# Altium PCB test4.PcbDoc
Units mil, origin at the board's own origin, x right, y up, seen from the top; angles counter-clockwise.
Board outline 6000 x 4000 mil, 2 copper layers (Top Layer, Bottom Layer); 114 components, 99 nets, 454 pads, 8 vias.
Unrouted connection lines stored in the file: 321.
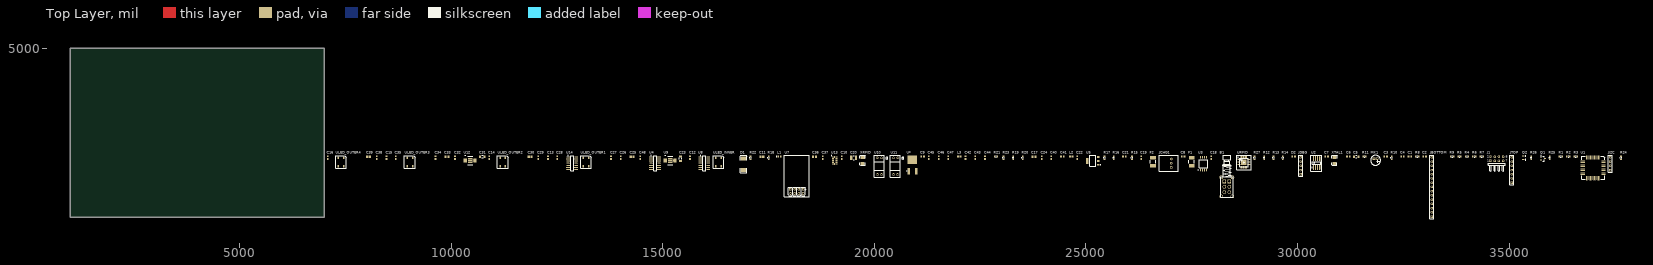
[diagram p0: Top Layer view]
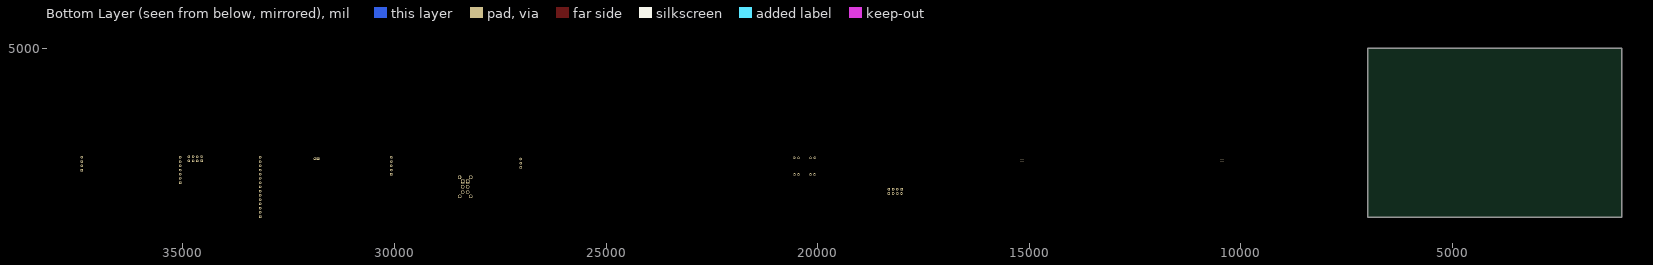
[diagram p1: Bottom Layer view, seen from below]

## Layer stack, top to bottom
Top Layer: signal copper 1.4
Dielectric: dielectric 12.6, FR-4, Dk 4.8
Bottom Layer: signal copper 1.4

## Board outline
1000,1000 7000,1000 7000,5000 1000,5000

## Design rules (kind name [scope] priority, off if disabled: settings)
Clearance [All] p1: gap=8
PolygonConnect [All] p1: connectstyle=Relief reliefconductorwidth=10 reliefentries=4 polygonreliefangle="90 Angle"
RoomDefinition main_pcb [InComponentClass('main_pcb')] p1: confinementstyle=ConfineIn formatcopy=TRUE lockcomponents=FALSE outline 7045,960 37800,960 37800,2580 7045,2580
RoutingVias [All] p1: holewidth=28 width=50 viastyle="Through Hole" minholewidth=28 minwidth=50 maxholewidth=28 maxwidth=50
SilkscreenOverComponentPads [All] p1: minsilkscreentomaskgap=10
SolderMaskExpansion [All] p1: expansion=4
Width [All] p1: maxlimit=10 minlimit=10 preferedwidth=10
27 further rules are at their usual default settings.

## Components (designator, comment, footprint, x,y, rotation, side; value= is the part's Value field where it differs from the comment)
B1 "ON/OFF" KGPS22F03 28325,1720 r0 top
C1 "100n" CAPC1608N 32655,2440 r0 top
C2 "18pF" CAPC1608N 33005,2440 r0 top
C3 "100n" CAPC1608N 32085,2440 r0 top
C4 "18pF" CAPC1608N 32480,2440 r0 top
C5 "10uF" CAPC3216L 31390,2435 r0 top
C6 "100nF" CAPC1608N 31200,2440 r0 top
C7 "100nF" CAPC1608N 30690,2440 r0 top
C8 "100n" CAPC1608N 27300,2440 r0 top
C9 "15p" CAPC1608N 21145,2440 r0 top
C10 "15p" CAPC1608N 19230,2410 r90 top
C11 "10u" CAPC2012N 17345,2430 r0 top
C12 "100n" CAPC1608N 15645,2410 r90 top
C13 "100n" CAPC1608N 12290,2410 r90 top
C14 "100n" CAPC1608N 10900,2410 r90 top
C15 "100n" CAPC1608N 8475,2410 r90 top
C16 "100n" CAPC1608N 7085,2410 r90 top
C17 "10uF" CAPC2012N 23775,2430 r0 top
C18 "100nF" CAPC1608N 27965,2410 r90 top
C19 "100nF" CAPC1608N 26310,2410 r90 top
C20 "100uF" CAPC3225N 19515,2410 r0 top
C21 "100n" CAPC1608N 25910,2440 r0 top
C22 "15p" CAPC1608N 24795,2410 r90 top
C23 "10uF" CAPC3216L 15425,2390 r90 top
C24 "47p" CAPC1608N 23955,2410 r90 top
C25 "10nF/16V" CAPC2012N 14280,2430 r0 top
C26 "100n" CAPC1608N 14010,2410 r90 top
C27 "100n" CAPC1608N 13780,2410 r90 top
C28 "100n" CAPC1608N 12510,2410 r90 top
C29 "100n" CAPC1608N 12060,2410 r90 top
C30 "2.2uF" CAPC2012N 11870,2430 r0 top
C31 "10uF" CAPC3216L 10740,2435 r0 top
C32 "100n" CAPC1608N 10095,2410 r90 top
C33 "10nF/16V" CAPC2012N 9905,2430 r0 top
C34 "100n" CAPC1608N 9635,2410 r90 top
C35 "100n" CAPC1608N 8695,2410 r90 top
C36 "Tantalum 1uF" CAPC2012N 18590,2430 r0 top
C37 "100n" CAPC1608N 18780,2410 r90 top
C38 "100n" CAPC1608N 8245,2410 r90 top
C39 "2.2uF" CAPC2012N 8055,2430 r0 top
C40 "180p" CAPC1608N 24185,2410 r90 top
C41 "10p" CAPC1608N 24445,2440 r0 top
C42 "47p" CAPC1608N 22155,2410 r90 top
C43 "180p" CAPC1608N 22385,2410 r90 top
C44 "10p" CAPC1608N 22615,2410 r90 top
C45 "15p" CAPC1608N 21290,2410 r90 top
C46 "100n (O)" CAPC1608N 21520,2410 r90 top
C47 "100n (O)" CAPC1608N 21750,2410 r90 top
C48 "100n" CAPC1608N 14470,2410 r90 top
D1 "MBR0540" DSO-C2/X3.3 16910,2255 r90 top
D2 "LED3" CAPC1608N 29910,2440 r0 top
F1 "miniSMDC260F/12" miniSMDC260F/12 27500,2315 r90 top
F2 "miniSMDC260F/12" miniSMDC260F/12 26590,2315 r90 top
J1 "XSP" HDR2X4H 34560,2335 r0 top
JBOTTOM "Header 15" HDR1X15 33175,1020 r90 top
JCHG1 "Charger" S3B-XH-A(LF)(SN) 26800,2280 r0 top
JDBG "Header 5" HDR1X5 30075,2020 r90 top
JI2C "Header 4" HDR1X4 37390,2120 r90 top
JTOP "Header 7" HDR1X7 35065,1820 r90 top
L1 "10uH" INDC1608N 17760,2440 r0 top
L2 "2.2uH" INDC2012L 24655,2440 r0 top
L3 "2.2uH" INDC2012L 22010,2440 r0 top
MK1 "Mic2" electret_6mm 31845,2350 r0 top
Q1 "IRLML2402" SOT-23_N 35800,2390 r0 top
Q2 "IRLML2244TRPbF" SOT23_NCH 35370,2410 r0 top
R1 "10k" RESC1608N 36220,2440 r0 top
R2 "10k" RESC1608N 36400,2440 r0 top
R3 "20k" RESC1608N 36575,2440 r0 top
R4 "10k" RESC1608N 34005,2440 r0 top
R5 "10K" RESC1608N 33830,2440 r0 top
R6 "10k" RESC1608N 34180,2440 r0 top
R7 "10k" RESC1608N 34355,2440 r0 top
R8 "100k" RESC1608N 32830,2440 r0 top
R9 "10k" RESC1608N 33655,2440 r0 top
R10 "3.3k" RESC1608N 32225,2410 r90 top
R11 "22" RESC1608N 31585,2440 r0 top
R12 "10k" RESC1608N 29215,2410 r90 top
R13 "10k" RESC1608N 29435,2410 r90 top
R14 "10k" RESC1608N 29655,2410 r90 top
R15 "820" RESC1608N 26090,2410 r90 top
R16 "5.1k" RESC1608N 25660,2410 r90 top
R17 "10k" RESC1608N 25440,2410 r90 top
R18 "10k" RESC1608N 17505,2410 r90 top
R19 "1K" RESC1608N 23285,2410 r90 top
R20 "" RESC1608N 23505,2410 r90 top
R21 "" RESC1608N 22875,2440 r0 top
R22 "10k" RESC1608N 17075,2410 r90 top
R23 "1K" RESC1608N 23055,2410 r90 top
R24 "10k" RESC1608N 37645,2410 r90 top
R25 "10k" RESC1608N 35960,2410 r90 top
R26 "10k" RESC1608N 35525,2410 r90 top
R27 "470" RESC1608N 28985,2410 r90 top
U1 "MCU" atmega644p 36975,2135 r0 top
U2 "LM358D" LM358D 30450,2285 r90 top
U3 "W25Q64BVSIG" W25Q64BVSIG 27785,2270 r90 top
U4 "SN74HC04D" D014_N 14820,2280 r0 top
U5 "AZ1117CH-3.3" SOT223 25175,2325 r0 top
U7 "ESP8266" ESP8266 18110,1615 r90 top
U8 "SN74HC08D" D014_N 15985,2280 r0 top
U9 "DRV8833" DRV8833 15175,2345 r0 top
U10 "ITR9608" ITR9608 20100,2185 r0 top
U11 "ITR9608" ITR9608 20480,2185 r0 top
U12 "DRV8833" DRV8833 10450,2345 r0 top
U13 "ADXL345BCCZ" ADXL345 19065,2345 r0 top
U14 "SN74HC08D" D014_N 12860,2280 r0 top
U* "AZ1084CD-5.0" AZ1084CD-5.0 20900,2255 r90 top
ULED_INNER "WS2812B" WS2812B 16320,2310 r90 top
ULED_OUTER1 "WS2812B" WS2812B 13195,2310 r90 top
ULED_OUTER2 "WS2812B" WS2812B 11225,2310 r90 top
ULED_OUTER3 "WS2812B" WS2812B 9030,2310 r90 top
ULED_OUTER4 "WS2812B" WS2812B 7405,2310 r90 top
URFID "MFRC52202HN1" MFRC52202HN1 28735,2300 r0 top
XRFID "7A-27.120MAAJ-T" XTAL 19740,2345 r90 top
XTAL1 "ABM7-8.000MHZ-D2Y-T" XTAL 30885,2345 r90 top

## Footprints (in the part's own frame and the unit in brackets; to place one, negate y for a bottom-side part, rotate by r counter-clockwise, add the part's x,y. Pads: shape width x height; smd on the part's side, far side on the other; paste and mask are expansions set on the pad)
ADXL345 [mm] "BGA, 14-Leads, Body 5.0x3.0mm,  Pitch 0.80mm"
  oct 1.145x0.55 smd: 1(-1.1,2)
  rect 1.145x0.55 smd: 2(-1.1,1.2) 3(-1.1,0.4) 4(-1.1,-0.4) 5(-1.1,-1.2) 6(-1.1,-2) 8(1.1,-2) 9(1.1,-1.2) 10(1.1,-0.4) 11(1.1,0.4) 12(1.1,1.2) 13(1.1,2)
  rect 0.6x1.145 smd: 7(0,-2) 14(0,2)
  silkscreen extent -2.05,2.88 -1.8,3.12, body extent -1.5,-2.5 1.5,2.5, height 1
atmega644p [mil]
  oval 16x100 smd: 1(167.45,282.95) 2(136.45,282.95) 3(104.45,282.95) 4(73.45,282.95) 5(41.45,282.95) 6(10.45,282.95) 7(-20.55,282.95) 8(-52.55,282.95) 9(-83.55,282.95) 10(-115.55,282.95) 11(-146.55,282.95) 23(-146.55,-207.05) 24(-115.55,-207.05) 25(-83.55,-207.05) 26(-52.55,-207.05) 27(-20.55,-207.05) 28(10.45,-207.05) 29(41.45,-207.05) 30(73.45,-207.05) 31(104.45,-207.05) 32(136.45,-207.05) 33(167.45,-207.05)
  oval 100x16 smd: 12(-234.55,194.95) 13(-234.55,163.95) 14(-234.55,131.95) 15(-234.55,100.95) 16(-234.55,68.95) 17(-234.55,37.95) 18(-234.55,6.95) 19(-234.55,-25.05) 20(-234.55,-56.05) 21(-234.55,-88.05) 22(-234.55,-119.05) 34(255.45,-119.05) 35(255.45,-88.05) 36(255.45,-56.05) 37(255.45,-25.05) 38(255.45,6.95) 39(255.45,37.95) 40(255.45,68.95) 41(255.45,100.95) 42(255.45,131.95) 43(255.45,163.95) 44(255.45,194.95)
  silkscreen extent -260,-232 280,308, body extent -183,-162 227,244, height 39
AZ1084CD-5.0 [mm] "D-PAK, 3-Pads, Body 6.2x6.7mm (max), IPC Low Density"
  rect 4x1.5 smd: 1(-4.2,2.1) 3(-4.2,-2.2)
  rect 5.25x5.6 smd: 2(2.8,0)
  silkscreen extent -4.07,3.24 -3.83,3.49, body extent -3.05,-3.35 3.15,3.35, height 2.38
CAPC1608N [mm] "Chip Capacitor, Body 1.6x0.8mm, IPC Medium Density"
  rect 1x1 smd: 1(-0.8,0) 2(0.8,0)
  body extent -0.87,-0.48 0.87,0.48, height 0.85
CAPC2012N [mm] "Chip Capacitor, Body 2.0x1.3mm, IPC Medium Density"
  rect 1.3x1.5 smd: 1(-0.85,0) 2(0.85,0)
  body extent -1.1,-0.72 1.1,0.72, height 1.1
CAPC3216L [mm] "Chip Capacitor, Body 3.2x1.6mm, IPC High Density"
  rect 1.1x1.7 smd: 1(-1.35,0) 2(1.35,0)
  silkscreen extent -0.4,-0.75 0.4,0.75, body extent -1.7,-0.9 1.7,0.9, height 1.3
CAPC3225N [mm] "Chip Capacitor, Body 3.2x2.5mm, IPC Medium Density"
  rect 1.3x2.7 smd: 1(-1.45,0) 2(1.45,0)
  silkscreen extent -0.4,-1.25 0.4,1.25, body extent -1.7,-1.35 1.7,1.35, height 1.5
D014_N [mm] "SOIC, 14-Leads, Body 8.7x3.9mm, Pitch 1.27mm, IPC Medium Density"
  oval 2.2x0.6 smd: 1(-2.4,3.81) 2(-2.4,2.54) 3(-2.4,1.27) 4(-2.4,0) 5(-2.4,-1.27) 6(-2.4,-2.54) 7(-2.4,-3.81) 8(2.4,-3.81) 9(2.4,-2.54) 10(2.4,-1.27) 11(2.4,0) 12(2.4,1.27) 13(2.4,2.54) 14(2.4,3.81)
  silkscreen extent -2.52,-4.4 0.9,4.78, body extent -1.95,-4.33 1.95,4.33, height 1.75
DRV8833 [mm]
  oval 2x0.35 smd: 1(-2.9,2.275) 2(-2.9,1.625) 3(-2.9,0.975) 4(-2.9,0.325) 5(-2.9,-0.325) 6(-2.9,-0.975) 7(-2.9,-1.625) 8(-2.9,-2.275) 9(2.9,-2.275) 10(2.9,-1.625) 11(2.9,-0.975) 12(2.9,-0.325) 13(2.9,0.325) 14(2.9,0.975) 15(2.9,1.625) 16(2.9,2.275)
  rect 2.7x2.8 smd: PP(0,0)
  silkscreen extent -3.02,-2.55 1.5,3.12, body extent -2.25,-2.55 2.25,2.55, height 1.2
DSO-C2/X3.3 [mm] "DO-214-AB/SMC; 2 C-Bend Leads; Body 7.9 x 5.9 mm, inc. leads (LxW)"
  rect 2.4x3.3 smd: 1(-3.475,0) 2(3.475,0)
  silkscreen extent -5.07,-2.05 5.43,2.05
electret_6mm [mil]
  round 60 hole 30: 1(37.4,39.37)
  rect 60x60 hole 30: 2(-37.4,39.37)
  silkscreen extent -118,-118 118,118
ESP8266 [mil]
  round 60 hole 32: CH_PD(-49.94,-9.12) GPIO0(50.06,-109.12) GPIO2(50.06,-9.12) RST(-49.94,-109.12) RXD(50.06,-209.12) TXD(-49.94,90.88) VCC(-49.94,-209.12)
  rect 60x60 hole 32: GND(50.06,90.88)
  silkscreen extent -130,-354 854,236, body extent -94,-248 91,130, height 315
HDR1X4 [mm] "Connector; Header; 4 Position"
  rect 1.5x1.5 hole 0.9: 1(0,0)
  round 1.5 hole 0.9: 2(2.54,0) 3(5.08,0) 4(7.62,0)
  silkscreen extent -1.27,-1.27 8.89,1.27
HDR1X5 [mm] "Connector; Header; 5 Position"
  rect 1.5x1.5 hole 0.9: 1(0,0)
  round 1.5 hole 0.9: 2(2.54,0) 3(5.08,0) 4(7.62,0) 5(10.16,0)
  silkscreen extent -1.27,-1.27 11.43,1.27
HDR1X7 [mm] "Connector; Header; 7 Position"
  rect 1.5x1.5 hole 0.9: 1(0,0)
  round 1.5 hole 0.9: 2(2.54,0) 3(5.08,0) 4(7.62,0) 5(10.16,0) 6(12.7,0) 7(15.24,0)
  silkscreen extent -1.27,-1.27 16.51,1.27
HDR1X15 [mm] "Connector; Header; 15 Position"
  rect 1.5x1.5 hole 0.9: 1(0,0)
  round 1.5 hole 0.9: 2(2.54,0) 3(5.08,0) 4(7.62,0) 5(10.16,0) 6(12.7,0) 7(15.24,0) 8(17.78,0) 9(20.32,0) 10(22.86,0) 11(25.4,0) 12(27.94,0) 13(30.48,0) 14(33.02,0) 15(35.56,0)
  silkscreen extent -1.27,-1.27 36.83,1.27
HDR2X4H [mm] "Connector; Header; 4x2 Position; Right Angle"
  rect 1.5x1.5 hole 0.9: 1(0,0)
  round 1.5 hole 0.9: 2(0,2.54) 3(2.54,0) 4(2.54,2.54) 5(5.08,0) 6(5.08,2.54) 7(7.62,0) 8(7.62,2.54)
  silkscreen extent -1.27,-6.35 8.89,-1.27
INDC1608N [mm] "Chip Inductor, Body 1.6x0.8mm, IPC Medium Density"
  rect 1x1 smd: 1(-0.8,0) 2(0.8,0)
  silkscreen extent -1.6,-0.4 -1.6,0.4, body extent -0.87,-0.48 0.87,0.48, height 0.71
INDC2012L [mm] "Chip Inductor, Body 2.0x1.2mm, IPC High Density"
  rect 1.2x1.4 smd: 1(-0.8,0) 2(0.8,0)
  body extent -1.1,-0.7 1.1,0.7, height 0.55
ITR9608 [mm]
  oval 1.2x1.5 hole 0.8: 1(-0.651,-4.316) 2(1.816,-4.316) 3(1.816,5.684) 4(-0.651,5.684)
  silkscreen extent -2.5,-5.87 5.6,7.13, body extent -2.42,-5.82 3.58,7.18, height 10
KGPS22F03 [mm]
  round 2.2 hole 1.4: 0(-3.146,-5.666) 0(-3.146,5.814) 0(3.399,-5.666) 0(3.5,5.814)
  rect 2.2x2.2 hole 1.5: 1(-1.334,3.296) 6(1.666,3.296)
  round 2.2 hole 1.5: 2(-1.334,0.096) 3(-1.334,-3.104) 4(1.666,-3.104) 5(1.666,0.096)
  silkscreen extent -3.59,-6.05 3.96,19.04, body extent -3.15,-5.7 3.5,19, height 9
LM358D [mm] "SOIC, 8-Leads, Body 5.0x4.0mm (max), Pitch 1.27mm, IPC Low Density"
  oval 2.9x0.7 smd: 1(-2.65,1.905) 2(-2.65,0.635) 3(-2.65,-0.635) 4(-2.65,-1.905) 5(2.65,-1.905) 6(2.65,-0.635) 7(2.65,0.635) 8(2.65,1.905)
  silkscreen extent -4.8,-3.2 4.7,3.5, body extent -2,-2.5 2,2.5, height 1.75
MFRC52202HN1 [mm] "QFN, 32-Leads, Body 5.1x5.1mm (max), Pitch 0.50mm, IPC Low Density"
  oval 1.65x0.25 smd: 1(-2.975,1.75) 2(-2.975,1.25) 3(-2.975,0.75) 4(-2.975,0.25) 5(-2.975,-0.25) 6(-2.975,-0.75) 7(-2.975,-1.25) 8(-2.975,-1.75) 17(2.975,-1.75) 18(2.975,-1.25) 19(2.975,-0.75) 20(2.975,-0.25) 21(2.975,0.25) 22(2.975,0.75) 23(2.975,1.25) 24(2.975,1.75)
  oval 0.25x1.65 smd: 9(-1.75,-2.975) 10(-1.25,-2.975) 11(-0.75,-2.975) 12(-0.25,-2.975) 13(0.25,-2.975) 14(0.75,-2.975) 15(1.25,-2.975) 16(1.75,-2.975) 25(1.75,2.975) 26(1.25,2.975) 27(0.75,2.975) 28(0.25,2.975) 29(-0.25,2.975) 30(-0.75,2.975) 31(-1.25,2.975) 32(-1.75,2.975)
  rect 3.3x3.3 smd: 33(0,0)
  silkscreen extent -4.3,-4.3 4.3,4.3, body extent -2.55,-2.55 2.55,2.55, height 1
miniSMDC260F/12 [mm] "Chip Capacitor, 2-Leads, Body 5.3x3.2mm, IPC Low Density"
  rect 2.1x3.5 smd: 1(-2.35,0) 2(2.35,0)
  silkscreen extent -0.9,-1.65 0.9,1.65, body extent -2.75,-1.71 2.75,1.7, height 1.52
RESC1608N [mm] "Chip Resistor, Body 1.6x0.8mm, IPC Medium Density"
  rect 0.9x1 smd: 1(-0.85,0) 2(0.85,0)
  silkscreen extent -0.2,-0.4 0.2,0.4, body extent -0.85,-0.48 0.85,0.48, height 0.6
S3B-XH-A(LF)(SN) [mil]
  round 60 hole 32: 1(216.54,-100) 2(216.54,0) 3(216.54,100)
  silkscreen extent -71,-193 382,193
SOT23_NCH [mm]
  rect 1.55x0.55 smd: D(0.925,0) G(-0.925,0.95) S(-0.925,-0.95)
  silkscreen extent 0.3,-1.5 0.7,1.5, body extent -0.7,-1.5 0.7,1.5, height 1.1
SOT223 [mm]
  rect 1.55x1.1 smd: 1(3.045,-2.031) 2(3.045,0.269) 3(3.045,2.569)
  rect 1.55x3.45 smd: 2(-3.705,0.269)
  silkscreen extent -2.18,-3.08 4.49,3.62, body extent -2.11,-3.01 1.49,3.59, height 4
SOT-23_N [mm] "SOT23, 3-Leads, Body 2.9x1.3mm, Pitch 0.95mm, Lead Span 2.3mm, IPC Medium Density"
  rect 1.15x0.6 smd: 1(-1.125,0.95) 2(-1.125,-0.95) 3(1.125,0)
  silkscreen extent -1.25,-1.5 0.7,1.92, body extent -0.7,-1.5 0.7,1.5, height 1.11
W25Q64BVSIG [mm]
  oval 1.75x0.6 smd: 1(-3.697,2.033) 2(-3.697,0.763) 3(-3.697,-0.507) 4(-3.697,-1.777) 5(3.839,-1.777) 6(3.839,-0.507) 7(3.839,0.763) 8(3.839,2.033)
  silkscreen extent -3.86,-2.32 2.48,3.43, body extent -2.29,-2.34 2.51,2.52, height 0.8
WS2812B [mm]
  rect 1.5x0.9 smd: 1(-2.519,1.678) 2(-2.519,-1.522) 3(2.581,-1.522) 4(2.581,1.678)
  silkscreen extent -3.9,-3.1 3.8,3.3, body extent -2.52,-2.42 2.48,2.58, height 0.6
XTAL [mm]
  rect 1.8x2.5 smd: 1(1.834,0.329) 2(-1.691,0.354)
  silkscreen extent -2.97,-1.27 3.13,1.95, body extent -2.2,-0.89 2.49,1.4, height 2.54

## Part data
B1: library part Component_1
C1 C2 C3 C4 C5 C8 C11 C12 C13 C14 C15 C16 C21 C23 C25 C30 C31 C33 C39: library part Cap, "Capacitor"
C6 C7 C9 C10 C18 C19 C22 C24 C26 C27 C28 C34 C35 C38 C40 C41 C42 C43 C44 C45 C46 C47: library part CAP, "Capacitor"
C17 C20 C29 C32 C36 C37 C48: library part "Cap Pol2", "Polarized Capacitor (Axial)"
D1: library part Diode, "Default Diode"
D2: "Typical BLUE SiC LED"
F1 F2: library part "Fuse Thermal", "Thermal Fuse"
J1: library part "Header 4X2H", "Header, 4-Pin, Dual row, Right Angle"
JBOTTOM: "Header, 15-Pin"
JCHG1: library part BATTCON
JDBG: "Header, 5-Pin"
JI2C: "Header, 4-Pin"
JTOP: "Header, 7-Pin"
L1 L2 L3: library part Inductor, "Inductor"
MK1: "Microphone"
Q1: "HEXFET Power MOSFET"
R1 R2 R3 R4 R5 R6 R7 R8 R9 R10 R11 R12 R13 R14 R15 R16 R17 R18 R19 R20 R21 R22 R23 R24 R25 R26 R27: library part Res2, "Resistor"
U1: library part ATmega644-20AU, "8-bit AVR Microcontroller, 2.7-5.5V, 20MHz, 64KB Flash, 2KB EEPROM, 4KB SRAM, 44-pin TQFP"
U2: "Dual Operational Amplifier"
U4: "Hex Inverter"
U5: library part LM1117
U8 U14: "Quadruple 2-Input Positive-AND Gate"
U13: library part ADXL345
XRFID: library part Tm08B.S01_12M_42

## Via types
v1: diameter 25.98, hole 12.99, Top Layer to Bottom Layer, tented top, 8 vias

## Nets (pads, with @x,y where several pads share a name; then routed paths per layer and width w, separated by ;. In a path a pad name is that pad's centre, name@x,y a point inside that pad or via, vN(x,y) a via of type N, cw(c..) or ccw(c..) an arc to the next point about the centre after c; other vN are vias at no path point)
ANT_GND: C1.2 C2.1 C4.1 C5.1 C6.2 C7.2 C8.2 C9.2 C10.2 C11.2 C12.2 C13.2 C14.2 C15.2 C16.2 C17.2 C18.1 C19.1 C20.2 C23.1 C24.1 C25.1 C26.2 C28.1 C29.2 C30.1 C31.1 C32.2 C33.1 C34.2 C36.2 C37.2 C38.1 C39.1 C40.1 C41.1 C42.2 C43.2 C44.2 C46.1 C47.1 C48.2 J1.6 JBOTTOM.1 JBOTTOM.8 JBOTTOM.13 JCHG1.1 JDBG.1 JI2C.3 JTOP.2 JTOP.4 MK1.2 Q1.3 R2.1 R5.2 R12.1 R27.2 U1.6 U1.18 U1.28 U1.39 U2.3 U2.4 U3.4 U4.3 U4.5 U4.7 U4.9 U5.2 U7.GND U7.GPIO0 U7.GPIO2 U8.7 U9.3 U9.6 U9.13 U9.PP U10.2 U10.4 U11.2 U11.4 U12.3 U12.6 U12.13 U12.PP U13.2 U13.4 U13.5 U14.1 U14.2 U14.4 U14.5 U14.7 U*.1 ULED_INNER.3 ULED_OUTER1.3 ULED_OUTER2.3 ULED_OUTER3.3 ULED_OUTER4.3 URFID.1 URFID.4 URFID.5 URFID.10 URFID.14 URFID.18
  other v1: 10426.38,2321.38 10473.62,2321.38 15151.38,2321.38 15198.62,2321.38 10426.38,2368.62 10473.62,2368.62 15151.38,2368.62 15198.62,2368.62
ANT_SIGA: C21.2 C22.2 C40.2 C41.2 JTOP.3
ANT_SIGB: C43.1 C44.1 C45.2 JTOP.1
ARM_SERVO_L: JBOTTOM.15 U1.43
ARM_SERVO_R: JBOTTOM.3 U1.44
BATT_SENSE: R2.2 R3.1 U1.32
CS_FLASH: U1.21 U3.1
CS_RFID_13: U1.15 URFID.24
DBG_LED: D2.1 JDBG.2 U1.36
INT_ACCEL: U1.41 U13.8
INT_RFID: U1.42 URFID.23
JBATT_3.7V: F2.1 JBOTTOM.9
JBATT_7.4V: F1.1 JBOTTOM.10
JMTRLA: C34.1 C35.2 JBOTTOM.5 U12.2
JMTRLB: C35.1 C38.2 JBOTTOM.4 U12.4
JMTRRA: C26.1 C27.2 JBOTTOM.12 U9.2
JMTRRB: C27.1 C28.2 JBOTTOM.11 U9.4
JSPKA: JBOTTOM.7 U12.7
JSPKB: JBOTTOM.6 U12.5
LEDS_3V: U1.24 ULED_INNER.4
MIC: R1.2 R8.2 U2.7
MISO: J1.1 U1.2 U3.2 URFID.31
MOSI: J1.4 U1.1 U3.5 URFID.30
MTR_L_DIR: U1.30 U4.11 U8.9
MTR_L_EN: U1.14 U8.10 U8.13
MTR_L_ENC: R21.1 U1.34 U11.3
MTR_R_DIR: U1.31 U4.1 U8.1
MTR_R_EN: U1.13 U8.2 U8.5
MTR_R_ENC: R20.1 U1.33 U10.3
NetB1_1: B1.1 JCHG1.3
NetB1_2: B1.2 F1.2
NetB1_5: B1.5 F2.2
NetB1_6: B1.6 JCHG1.2
NetC2_2: C2.2 U1.7 XTAL1.2
NetC3_1: C3.1 R11.1
NetC3_2: C3.2 MK1.1 R10.2
NetC4_2: C4.2 U1.8 XTAL1.1
NetC7_1: C7.1 U1.29
NetC9_1: C9.1 URFID.22 XRFID.2
NetC10_1: C10.1 URFID.21 XRFID.1
NetC12_1: C12.1 D1.2 ULED_INNER.1
NetC21_1: C21.1 R16.1
NetC22_1: C22.1 C24.2 L2.2
NetC25_2: C25.2 U9.11
NetC30_2: C30.2 U9.14
NetC33_2: C33.2 U12.11
NetC39_2: C39.2 U12.14
NetC42_1: C42.1 C45.1 L3.2
NetD2_2: D2.2 R27.1
NetJTOP_5: JTOP.5 R4.2
NetJTOP_7: JTOP.7 Q2.D
NetL2_1: L2.1 URFID.11
NetL3_1: L3.1 URFID.13
NetQ1_1: Q1.1 R25.2
NetQ1_2: Q1.2 R24.2 R26.1
NetQ2_G: Q2.G R26.2
NetR1_1: R1.1 U1.37
NetR8_1: R8.1 R11.2 U2.6
NetR12_2: R12.2 R13.1 U2.5
NetR13_2: R13.2 R14.1
NetR15_1: R15.1 R16.2 URFID.17
NetR15_2: R15.2 URFID.16
NetR18_2: R18.2 U7.CH_PD
NetR19_1: R19.1 U10.1
NetR22_2: R22.2 U13.7
NetR23_1: R23.1 U11.1
NetU2_1: U2.1 U2.2
NetU4_2: U4.2 U8.4
NetU4_10: U4.10 U8.12
NetU4_12: U4.12 U14.12
NetU8_3: U8.3 U9.16
NetU8_6: U8.6 U9.15
NetU8_8: U8.8 U12.16
NetU8_11: U8.11 U12.15
NetU12_9: U12.9 U14.8
NetU12_10: U12.10 U14.11
NetULED_INNER_2: ULED_INNER.2 ULED_OUTER1.4
NetULED_OUTER1_2: ULED_OUTER1.2 ULED_OUTER2.4
NetULED_OUTER2_2: ULED_OUTER2.2 ULED_OUTER3.4
NetULED_OUTER3_2: ULED_OUTER3.2 ULED_OUTER4.4
RESET: J1.5 R9.2 U1.4
RESET_RFID: R17.2 U1.35 URFID.6
RST_WIFI: U1.40 U7.RST
RXD_FTDI: J1.8 U1.10
RXD_WIFI: U1.12 U7.TXD
SCK: J1.3 U1.3 U3.6 URFID.29
SCL: JI2C.2 R6.1 U1.19 U13.14
SDA: JI2C.1 R7.1 U1.20 U13.13
SPK_DIR: U1.26 U4.13 U14.9
SPK_EN: U1.16 U14.10 U14.13
TXD_FTDI: J1.7 U1.9
TXD_WIFI: U1.11 U7.RXD
ULTRA_ECHO: R4.1 R5.1 U1.23
ULTRA_PWR: R25.1 U1.25
ULTRA_TRIG: JTOP.6 U1.22
V3: C5.2 C6.1 C8.1 C17.1 C18.2 C19.2 C29.1 C32.1 C36.1 C37.1 C46.2 C47.2 C48.1 J1.2 JDBG.3 JI2C.4 R6.2 R7.2 R9.1 R10.1 R14.2 R17.1 R18.1 R19.2 R20.2 R21.2 R22.1 R23.2 U1.5 U1.17 U1.27 U1.38 U3.8 U4.14 U5.1 U7.VCC U8.14 U9.1 U12.1 U13.1 U13.6 U14.14 URFID.2 URFID.3 URFID.12 URFID.15 URFID.32
V5: C20.1 JBOTTOM.2 JBOTTOM.14 JDBG.4 L1.1 U*.2
VBATT: B1.3 C1.1 C23.2 C31.2 JDBG.5 R3.2 U2.8 U5.3 U9.12 U12.12 U*.3
VLEDS: C11.1 C13.1 C14.1 C15.1 C16.1 D1.1 L1.2 Q2.S R24.1 ULED_OUTER1.1 ULED_OUTER2.1 ULED_OUTER3.1 ULED_OUTER4.1
pads on no net: B1.0 B1.4 U3.3 U3.7 U4.4 U4.6 U4.8 U9.5 U9.7 U9.8 U9.9 U9.10 U12.8 U13.3 U13.9 U13.10 U13.11 U13.12 U14.3 U14.6 ULED_OUTER4.2 URFID.7 URFID.8 URFID.9 URFID.19 URFID.20 URFID.25 URFID.26 URFID.27 URFID.28 URFID.33

## Text inside footprints (layer, text, board x,y; h text height)
J1: Top Overlay "8" at 34920,2415 h50; Top Overlay "7" at 34920,2315 h50; Top Overlay "1" at 34480,2315 h50; Top Overlay "2" at 34480,2415 h50